# EAGLE board Headlightsv1 (EAGLE 7.6.0)
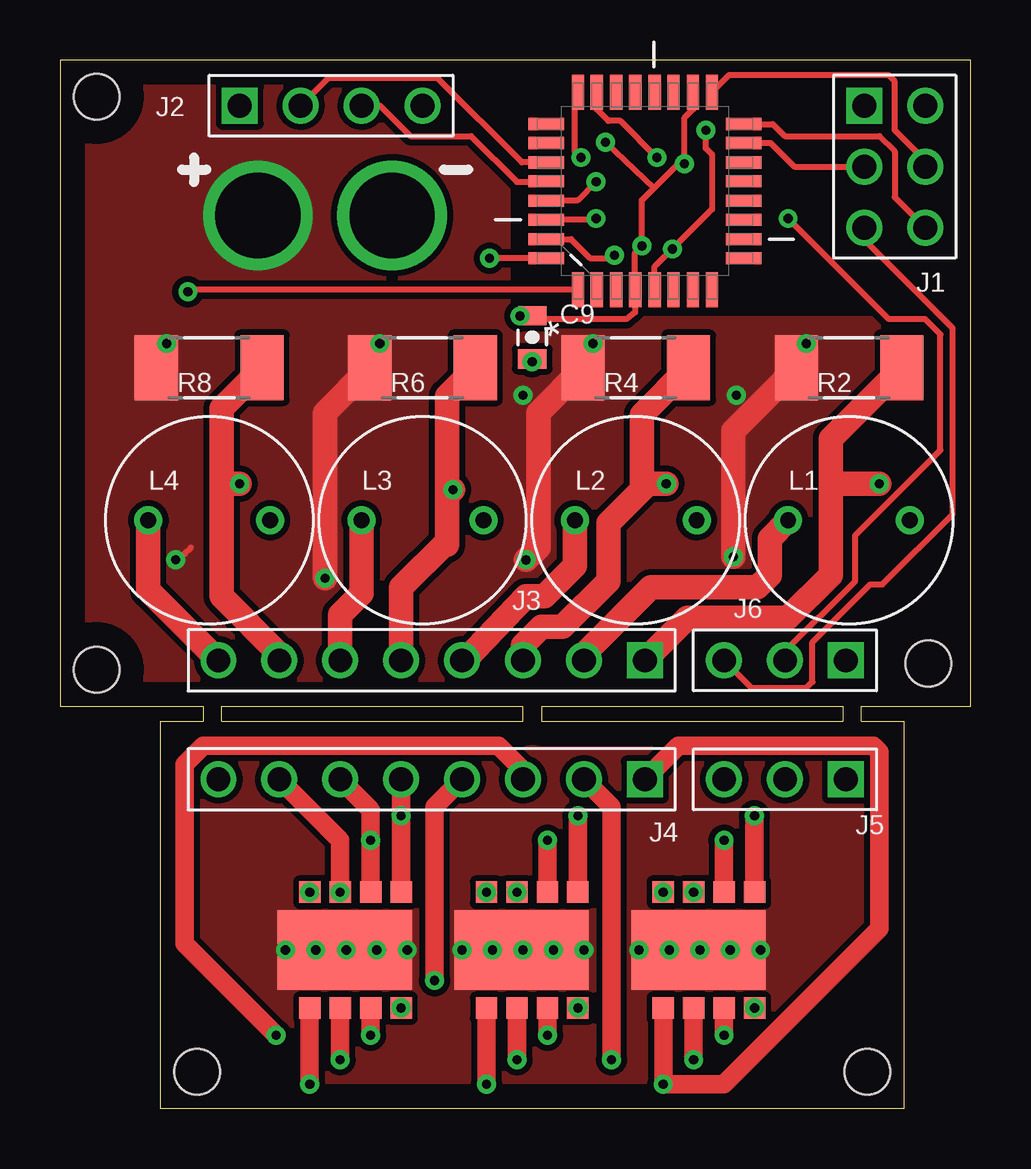
[diagram p0: board, top side]
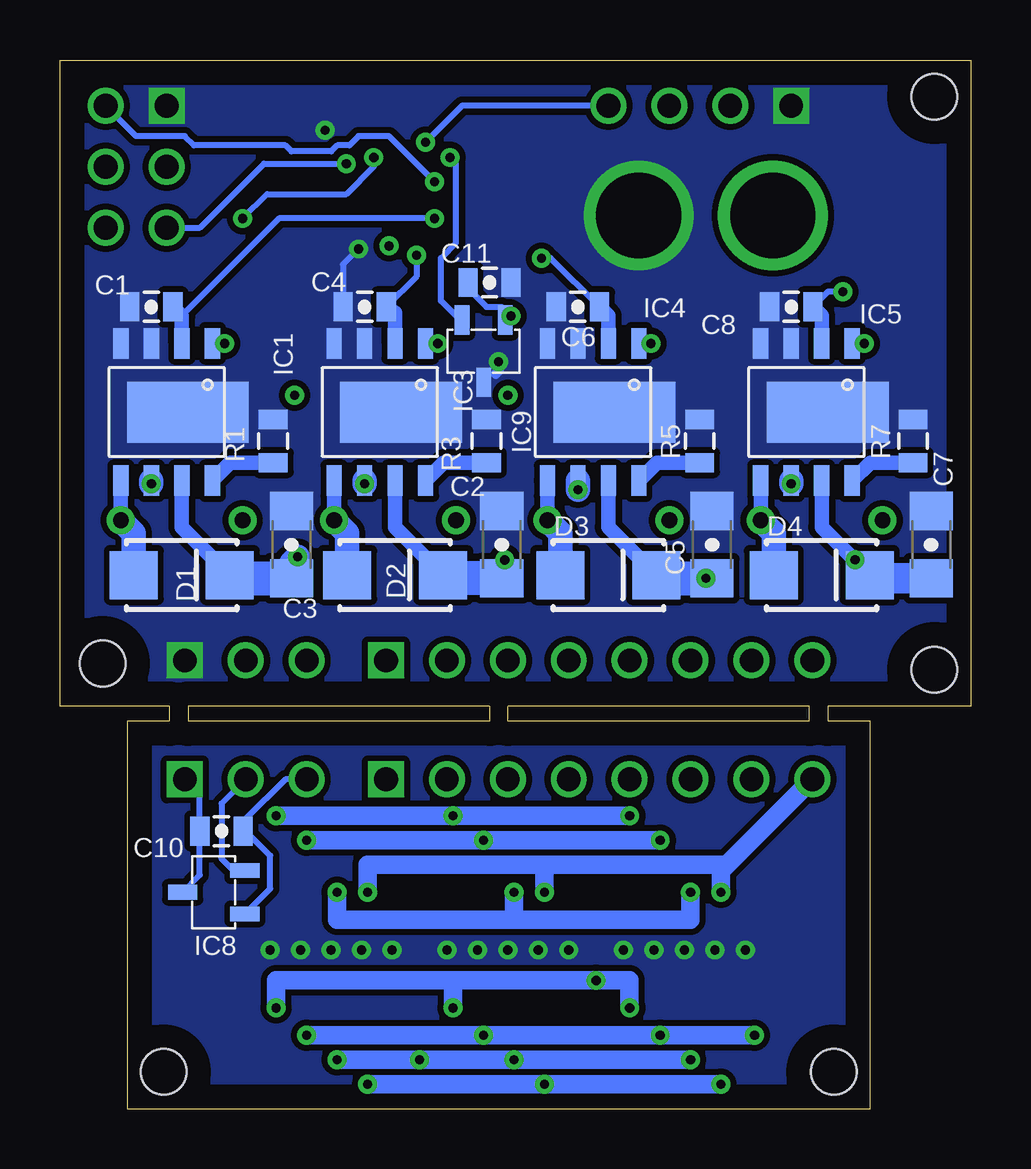
[diagram p1: board, bottom side, seen from below]

Size 37.97 x 43.69 mm. Coordinates in mm from the lower left corner, seen from the top.
Outline: 0,16.76 5.97,16.76 5.97,16.13 4.19,16.13 4.19,0 35.18,0 35.18,16.13 33.4,16.13 33.4,16.76 37.97,16.76 37.97,43.69 0,43.69 0,16.76
Outline: 6.73,16.76 19.3,16.76 19.3,16.13 6.73,16.13 6.73,16.76
Outline: 20.07,16.76 32.64,16.76 32.64,16.13 20.07,16.13 20.07,16.76
Copper layers (1*16): Top 0.035mm / dielectric 1.5mm / Bottom 0.035mm
Design rules "default": minimum track width 10mil, minimum drill 24mil, track to track 8mil, track to pad 8mil, pad to pad 8mil, via to via 8mil, smd to smd 8mil, copper to edge 40mil, drill to drill 8mil, minimum pad ring 10mil, minimum via ring 8mil, stop-mask expansion 4mil, vias tented up to drill 0mil, thermal gap 10mil
Holes 1.91 mm at 36.2,18.54 1.52,18.29 1.52,42.16 5.71,1.52 33.66,1.52

## Footprints (pad centres in the part's own frame; a part is rotated, then mirrored left to right if it is on the bottom)
0805-CAP = smd 0.8 x 1.2: 1 -0.9,0; 2 0.9,0
1206-CAP = smd 1.6 x 1.8: 1 -1.4,0; 2 1.4,0
SMA-DIODE_ALT = smd 2 x 2: A -2,0; C 2,0
PG-DSO-8-27 = smd 0.635 x 1.27: P$1 0,0; P$2 1.27,0; P$3 2.54,0; P$4 3.81,0; P$5 3.81,5.715; P$6 2.54,5.715; P$7 1.27,5.715; P$8 0,5.715 | smd 5.08 x 2.54: P$9 1.016,2.857
LED_RGBW_CUSTOM = smd 0.889 x 0.889: 1 0,0; 2 1.27,0; 3 2.54,0; 4 3.81,0; 5 3.81,4.826; 6 2.54,4.826; 7 1.27,4.826; 8 0,4.826 | smd 5.588 x 3.302: 9 1.46,2.413
SOT-23-3 = smd 1.219 x 0.61: 1 -1.36,0.78; 2 -1.36,-1.02; 3 1.24,-0.12
2X3PIN_.1' = drill 0.991: P$1 -1.27,1.27; P$2 1.27,1.27; P$3 -1.27,-1.27; P$4 1.27,-1.27; P$5 -1.27,-3.81 | drill 0.991 square: P$6 1.27,-3.81
4PIN_.1' = drill 0.991 square: P$1 -3.81,0 | drill 0.991: P$2 -1.27,0; P$3 1.27,0; P$4 3.81,0
8PIN_.1' = drill 0.991 square: P$1 -8.89,0 | drill 0.991: P$2 -6.35,0; P$3 -3.81,0; P$4 -1.27,0; P$5 1.27,0; P$6 3.81,0; P$7 6.35,0; P$8 8.89,0
3PIN_.1' = drill 0.991 square: P$1 -2.54,0 | drill 0.991: P$2 0,0; P$3 2.54,0
IND_RLB_SERIES = drill 0.66: P$1 -2.54,0; P$2 2.54,0
0805 = smd 0.8 x 1.2: 1 -0.9,0; 2 0.9,0
R2010 = smd 1.8 x 2.7: 1 -2.2,0; 2 2.2,0
QFP80P900X900X120-32N = smd 1.473 x 0.508: 1 -4.115,2.794; 2 -4.115,2.007; 3 -4.115,1.194; 4 -4.115,0.406; 5 -4.115,-0.406; 6 -4.115,-1.194; 7 -4.115,-2.007; 8 -4.115,-2.794; 17 4.115,-2.794; 18 4.115,-2.007; 19 4.115,-1.194; 20 4.115,-0.406; 21 4.115,0.406; 22 4.115,1.194; 23 4.115,2.007; 24 4.115,2.794 | smd 0.508 x 1.473: 9 -2.794,-4.115; 10 -2.007,-4.115; 11 -1.194,-4.115; 12 -0.406,-4.115; 13 0.406,-4.115; 14 1.194,-4.115; 15 2.007,-4.115; 16 2.794,-4.115; 25 2.794,4.115; 26 2.007,4.115; 27 1.194,4.115; 28 0.406,4.115; 29 -0.406,4.115; 30 -1.194,4.115; 31 -2.007,4.115; 32 -2.794,4.115

## Placement (x,y rotation side)
C1  10uF  [0805-CAP]  34.16,33.4 180 bottom
C2  1uF  [1206-CAP]  19.56,23.5 90 bottom
C3  1uF  [1206-CAP]  28.32,23.5 90 bottom
C4  10uF  [0805-CAP]  25.27,33.4 180 bottom
C5  1uF  [1206-CAP]  10.79,23.5 90 bottom
C6  10uF  [0805-CAP]  16.38,33.4 180 bottom
C7  1uF  [1206-CAP]  1.65,23.5 90 bottom
C8  10uF  [0805-CAP]  7.49,33.4 180 bottom
C9  0.33uF  [0805-CAP]  19.68,32.13 270 top
C10  0.33uF  [0805-CAP]  31.24,11.56 0 bottom
C11  0.33uF  [0805-CAP]  20.07,34.42 0 bottom
D1  [SMA-DIODE_ALT]  32.89,22.23 0 bottom
D2  [SMA-DIODE_ALT]  24,22.23 0 bottom
D3  [SMA-DIODE_ALT]  15.11,22.23 0 bottom
D4  [SMA-DIODE_ALT]  6.22,22.23 0 bottom
IC1  ILD6150_LED_DRIVER  [PG-DSO-8-27]  31.62,31.88 180 bottom
IC2  LED_RGBW_CONF2  [LED_RGBW_CUSTOM]  25.15,4.19 0 top
IC3  ILD6150_LED_DRIVER  [PG-DSO-8-27]  22.73,31.88 180 bottom
IC4  ILD6150_LED_DRIVER  [PG-DSO-8-27]  13.84,31.88 180 bottom
IC5  ILD6150_LED_DRIVER  [PG-DSO-8-27]  4.95,31.88 180 bottom
IC6  LED_RGBW_CONF2  [LED_RGBW_CUSTOM]  10.41,4.19 0 top
IC7  LED_RGBW_CONF2  [LED_RGBW_CUSTOM]  17.78,4.19 0 top
IC8  TEMP_MCP9701  [SOT-23-3]  31.62,8.89 180 bottom
IC9  TEMP_MCP9701  [SOT-23-3]  20.19,31.5 270 bottom
J1  ISPHEADER  [2X3PIN_.1']  34.8,37.97 180 top
J2  CONNECTOR_4PIN  [4PIN_.1']  11.3,41.78 0 top
J3  CONNECTOR_8PIN  [8PIN_.1']  15.49,18.67 180 top
J4  CONNECTOR_8PIN  [8PIN_.1']  15.49,13.72 180 top
J5  CONNECTOR_3PIN  [3PIN_.1']  30.23,13.72 180 top
J6  CONNECTOR_3PIN  [3PIN_.1']  30.23,18.67 180 top
L1  33uH  [IND_RLB_SERIES]  32.89,24.51 0 top
L2  33uH  [IND_RLB_SERIES]  24,24.51 0 top
L3  33uH  [IND_RLB_SERIES]  15.11,24.51 0 top
L4  33uH  [IND_RLB_SERIES]  6.22,24.51 0 top
R1  10k  [0805]  29.08,27.81 90 bottom
R2  .11  [R2010]  32.89,30.86 180 top
R3  10k  [0805]  20.19,27.81 90 bottom
R4  .11  [R2010]  24,30.86 180 top
R5  10k  [0805]  11.3,27.81 90 bottom
R6  .11  [R2010]  15.11,30.86 180 top
R7  10k  [0805]  2.41,27.81 90 bottom
R8  .11  [R2010]  6.22,30.86 180 top
U1  ATTINY48-AU  [QFP80P900X900X120-32N]  24.38,38.23 90 top

## Library data of the parts
C1 C4 C6 C8 = SparkFun-Capacitors; PROD_ID: CAP-11330
C2 C3 C5 C7 = SparkFun-Capacitors
C9-C11 = SparkFun-Capacitors; PROD_ID: CAP-08469
D1-D4 = SparkFun-DiscreteSemi
IC1-IC9 J1-J6 L1-L4 = lolomolo
R1 R3 R5 R7 = SparkFun-Resistors; PROD_ID: RES-11622
R2 R4 R6 R8 = SparkFun-Resistors; PROD_ID: RES-08354
U1 = Atmel_By_element14_Batch_1-00; MPN: ATTINY48-AU; OC_FARNELL: 1636953; OC_NEWARK: 68T3768; PACKAGE: QFP-32; SUPPLIER: Atmel

## Nets
5V: C9.1 C11.1 IC9.1 J1.P$2 J2.P$4 J6.P$3 U1.4 U1.18
5VO: C10.2 IC8.1 J5.P$3
BA: J3.P$6 L3.P$1
BAO: IC2.6 IC6.6 IC7.6 J4.P$6
BC: IC4.P$6 J3.P$5 R6.1
BCO: IC2.5 IC6.5 IC7.5 J4.P$5
DIMB: C6.1 IC4.P$2 U1.32
DIMG: C4.1 IC3.P$2 U1.31
DIMR: C1.1 IC1.P$2 U1.30
DIMW: C8.1 IC5.P$2 U1.1
GA: J3.P$4 L2.P$1
GAO: IC2.4 IC6.4 IC7.4 J4.P$4
GC: IC3.P$6 J3.P$3 R4.1
GCO: IC2.3 IC6.3 IC7.3 J4.P$3
GND: C1.2 C2.2 C3.2 C4.2 C5.2 C6.2 C7.2 C8.2 C9.2 C11.2 IC1.P$3 IC1.P$4 IC1.P$9 IC3.P$3 IC3.P$4 IC3.P$9 IC4.P$3 IC4.P$4 IC4.P$9 IC5.P$3 IC5.P$4 IC5.P$9 IC9.3 J1.P$6 J2.P$1 J6.P$1 R1.2 R3.2 R5.2 R7.2 U1.5
GNDO: C10.1 IC8.3 J5.P$1
HEAT: IC2.9 IC6.9 IC7.9
MISO: J1.P$1 U1.16
MOSI: J1.P$4 U1.15
N$1: IC1.P$8 R1.1
N$2: IC3.P$8 R3.1
N$3: D2.A IC3.P$5 L2.P$2
N$4: IC4.P$8 R5.1
N$5: D1.A IC1.P$5 L1.P$2
N$6: D3.A IC4.P$5 L3.P$2
N$7: IC5.P$8 R7.1
N$8: D4.A IC5.P$5 L4.P$2
RA: J3.P$2 L1.P$1
RAO: IC2.2 IC6.2 IC7.2 J4.P$2
RC: IC1.P$6 J3.P$1 R2.1
RCO: IC2.1 IC6.1 IC7.1 J4.P$1
RESET: J1.P$5 U1.29
SCK: J1.P$3 U1.17
SCL: J2.P$3 U1.28
SDA: J2.P$2 U1.27
TEMP1: J6.P$2 U1.23
TEMP1O: IC8.2 J5.P$2
TEMP2: IC9.2 U1.24
TEMP3: U1.25
TEMP4: U1.26
TEMP5: U1.19
TEMP6: U1.22
VBAT: C2.1 C3.1 C5.1 C7.1 D1.C D2.C D3.C D4.C IC1.P$1 IC1.P$7 IC3.P$1 IC3.P$7 IC4.P$1 IC4.P$7 IC5.P$1 IC5.P$7 R2.2 R4.2 R6.2 R8.2
WA: J3.P$8 L4.P$1
WAO: IC2.8 IC6.8 IC7.8 J4.P$8
WC: IC5.P$6 J3.P$7 R8.1
WCO: IC2.7 IC6.7 IC7.7 J4.P$7

## Tracks (layer width: path | path; a pad name or v marks a point on that pad's centre or on a via)
5V  (via drill 0.38)
  Top 0.254: J6.P$3 28.83,17.53 31.11,17.53 31.37,17.78 31.37,19.43 33.78,21.84 34.29,21.84 37.21,24.77 37.21,32.51 33.53,36.2 J1.P$2 | v22.73,40.26 24.77,38.35 | C9.1 v19.19,33.03 v19.18,33.02 19.3,32.89 23.62,32.89 23.98,33.17 U1.4 23.98,35.66 v24.26,35.94 24.26,37.85 24.77,38.35 | 24.77,38.35 25.78,39.37 v26.04,39.37 26.04,41.27 26.42,41.66 26.42,42.32 U1.18
  Bottom 0.254: J1.P$2 32.13,36.7 29.46,39.37 v26.04,39.37 | J2.P$4 21.21,41.78 v22.73,40.26 | IC9.1 19.25,33.02 v19.18,33.02 19.56,33.4 20.19,33.4 20.97,34.17 C11.1
5VO
  Bottom 0.254: J5.P$3 28.57,13.72 30.23,12.06 30.23,11.67 C10.2 30.23,11.56 29.21,10.54 29.21,9.16 IC8.1
BA
  Top 1.016: J3.P$6 11.68,20.57 12.57,21.46 L3.P$1
BAO  (via drill 0.38)
  Top 0.762: IC6.6 v12.95,11.18 12.95,12.45 J4.P$6 | v20.32,11.18 IC7.6 | IC2.6 v27.69,11.18
  Bottom 0.762: v12.95,11.18 v20.32,11.18 v27.69,11.18
BC  (via drill 0.38)
  Top 1.016: R6.1 16.13,29.68 16.13,25.78 | 16.13,25.78 16.13,23.62 | 16.13,23.62 16.13,23.5 | 16.13,25.78 v16.38,25.78 | J3.P$5 14.22,21.72 16.13,23.62
  Bottom 1.016: v16.38,25.78 IC4.P$6
BCO  (via drill 0.38)
  Top 0.762: IC2.5 v28.96,12.19 | v21.59,12.19 IC7.5 | IC6.5 v14.22,12.19 J4.P$5
  Bottom 0.762: v28.96,12.19 v21.59,12.19 v14.22,12.19
DIMB  (via drill 0.38)
  Top 0.254: U1.32 v17.91,35.43
  Bottom 0.254: v17.91,35.43 17.52,35.43 C6.1
  Bottom 0.61: IC4.P$2 15.11,33.03 C6.1
DIMG  (via drill 0.38)
  Top 0.254: U1.31 21.31,36.22 22.1,35.43 22.99,35.43 v23.11,35.56
  Bottom 0.254: v23.11,35.56 23.11,34.66 C4.1
  Bottom 0.61: IC3.P$2 24,33.16 C4.1
DIMR  (via drill 0.38)
  Top 0.254: v22.35,37.08 22.3,37.03 U1.30
  Bottom 0.254: 32.89,33.03 28.84,37.08 v22.35,37.08
  Bottom 0.61: IC1.P$2 32.89,33.03 C1.1
DIMW  (via drill 0.38)
  Top 0.254: U1.1 5.41,34.11 v5.33,34.04
  Bottom 0.254: v5.33,34.04 5.96,34.04 C8.1
  Bottom 0.61: IC5.P$2 6.22,33.03 C8.1
GA
  Top 1.016: J3.P$4 16.89,18.67 19.43,21.34 20.19,21.34 21.46,22.61 L2.P$1
GAO  (via drill 0.38)
  Top 0.762: v15.62,5.33 15.62,12.57 J4.P$4
  Bottom 0.762: IC6.4 14.22,5.33 v15.62,5.33 21.59,5.33 | 21.59,5.33 28.96,5.33 IC2.4 | IC7.4 21.59,5.33
  other vias: 14.22,4.19 28.96,4.19 21.59,4.19
GC  (via drill 0.38)
  Top 1.016: R4.1 24.26,28.91 24.26,26.04 24.51,26.04 | v25.27,26.04 24.51,26.04 | J3.P$3 19.3,19.3 20.07,20.07 20.95,20.07 22.86,21.97 22.86,24.38 24.51,26.04
  Bottom 1.016: IC3.P$6 v25.27,26.04
GCO  (via drill 0.38)
  Top 0.762: IC6.3 v12.95,3.05 | v27.69,3.05 IC2.3 | IC7.3 v20.32,3.05 | J4.P$3 19.3,14.1 18.29,15.11 5.97,15.11 5.21,14.35 5.21,6.86 v9.02,3.05
  Bottom 0.762: v27.69,3.05 v20.32,3.05 v12.95,3.05 v9.02,3.05
GND  (via drill 0.38, 3.56)
  Top 0.254: U1.5 24.79,35.08 v25.53,35.81 27.18,37.47 27.18,39.75 26.92,40.01 v26.92,40.77
  Top 0.406: C9.2 v19.68,31.11
  Bottom 0.254: v25.53,35.81 26.17,35.17 C4.2 | J1.P$6 33.53,42.16
  Bottom 0.406: v19.68,31.11 19.68,30.73 19.81,30.61
  other vias: 13.84,37.21
  pour Bottom (isolate 0.254, no thermals): 0,16.76 37.97,16.76 37.97,43.69 0,43.69
GNDO
  Bottom 0.254: J5.P$1 32.14,13.09 C10.1 32.14,9.73 IC8.3
HEAT  (via drill 0.38)
  other vias: 9.4,6.6 10.67,6.6 11.94,6.6 13.21,6.6 14.48,6.6 16.76,6.6 18.03,6.6 19.3,6.6 20.57,6.6 21.84,6.6 24.13,6.6 25.4,6.6 26.67,6.6 27.94,6.6 29.21,6.6
  pour Top (isolate 0.254, no thermals): 4.32,16 35.05,16 35.05,0.13 4.32,0.13
  pour Bottom (isolate 0.254, no thermals): 4.32,16 35.05,16 35.05,0.13 4.32,0.13
MISO
  Top 0.254: U1.16 29.72,41.02 30.23,40.51 34.16,40.51 34.8,39.88 34.8,37.97 J1.P$1
MOSI
  Top 0.254: U1.15 29.62,40.23 30.61,39.24 J1.P$4
N$1
  Bottom 0.61: R1.1 30.87,26.91 IC1.P$8
N$2
  Bottom 0.61: R3.1 21.98,26.91 IC3.P$8
N$3
  Bottom 0.61: IC3.P$5 L2.P$2
  Bottom 1.016: L2.P$2 26,23.97 D2.A
N$4
  Bottom 0.61: R5.1 13.09,26.91 IC4.P$8
N$5
  Bottom 0.61: IC1.P$5 L1.P$2
  Bottom 1.016: L1.P$2 34.89,23.97 D1.A
N$6
  Bottom 0.61: IC4.P$5 L3.P$2
  Bottom 1.016: L3.P$2 17.11,23.97 D3.A
N$7
  Bottom 0.61: R7.1 4.2,26.91 IC5.P$8
N$8
  Bottom 0.61: IC5.P$5 L4.P$2
  Bottom 1.016: L4.P$2 8.22,23.97 D4.A
RA
  Top 1.016: L1.P$1 29.59,23.75 29.59,22.23 29.08,21.72 24.64,21.72 21.84,18.92 J3.P$2
RAO  (via drill 0.38)
  Top 0.762: IC6.2 v11.68,2.03 | v26.42,2.03 IC2.2 | IC7.2 v19.05,2.03 | J4.P$2 22.99,12.57 v22.99,2.03
  Bottom 0.762: v11.68,2.03 v19.05,2.03 v22.99,2.03 v26.42,2.03
RC  (via drill 0.38)
  Top 1.016: R2.1 32.13,27.9 32.13,26.04 | 32.13,26.04 32.13,22.23 30.35,20.45 26.16,20.45 J3.P$1 | v34.16,26.04 32.13,26.04
  Bottom 1.016: IC1.P$6 v34.16,26.04
RCO  (via drill 0.38)
  Top 0.762: IC6.1 v10.41,1.02 | v17.78,1.02 IC7.1 | IC2.1 v25.15,1.02 27.69,1.02 34.16,7.49 34.16,14.86 33.91,15.11 25.78,15.11 J4.P$1
  Bottom 0.762: v10.41,1.02 v17.78,1.02 v25.15,1.02
RESET  (via drill 0.38)
  Top 0.254: U1.29 20.3,37.85 21.59,37.85 v22.35,38.61
  Bottom 0.254: J1.P$5 34.8,40.51 32.77,40.51 32.38,40.13 28.57,40.13 28.32,39.88 26.67,39.88 26.42,40.13 25.91,40.13 25.53,40.51 24.26,40.51 v22.35,38.61
SCK
  Top 0.254: J1.P$3 36.07,39.5 34.8,40.77 34.8,42.8 34.54,43.05 27.89,43.05 U1.17
SCL
  Top 0.254: J2.P$3 13.34,41.78 14.61,40.51 17.14,40.51 19.05,38.61 20.24,38.61 U1.28
SDA
  Top 0.254: U1.27 19.25,39.42 15.75,42.93 11.18,42.93 J2.P$2
TEMP1  (via drill 0.38)
  Top 0.254: J6.P$2 30.23,19.05 33.15,21.97 33.15,23.88 36.7,27.43 36.7,32.26 36.07,32.89 34.54,32.89 v30.35,37.08 | v24.89,39.62 23.37,41.15 22.86,41.15 22.38,41.63 U1.23
  Bottom 0.254: v30.35,37.08 29.34,38.1 26.04,38.1 24.89,39.24 v24.89,39.62
TEMP1O
  Bottom 0.254: J5.P$2 31.24,12.7 31.24,10.41 30.73,9.91 IC8.2
TEMP2  (via drill 0.38)
  Top 0.254: v21.72,39.62 21.46,39.88 21.46,42.22 U1.24
  Bottom 0.254: IC9.2 21.3,32.86 22.1,33.66 22.1,35.43 21.46,36.07 21.46,39.37 v21.72,39.62
VBAT  (via drill 0.38, 3.56)
  Top 0.254: v4.83,22.86 5.21,23.11 5.46,23.37
  Top 0.61: v4.45,31.88 3.94,30.95 R8.2 | v13.34,31.88 13.34,31.28 | v22.23,31.88 22.23,31.28 | v31.11,31.88 31.11,31.28 R2.2
  Top 0.813: R4.2 22.23,31.28 | R6.2 13.34,31.28
  Top 1.016: R6.2 11.05,29 v11.05,22.09 | R4.2 19.94,29 19.94,23.37 v19.43,22.86 | R2.2 28.07,28.23 v28.07,22.99
  Bottom 0.254: D4.C 4.22,22.26 v4.83,22.86
  Bottom 0.61: IC3.P$7 24,24.23 D2.C | IC1.P$7 32.89,24.23 D1.C | IC4.P$7 15.11,24.23 D3.C | IC5.P$7 6.22,24.23 D4.C | IC5.P$1 v4.45,31.88 | IC4.P$1 v13.34,31.88 | IC3.P$1 v22.23,31.88 | IC1.P$1 v31.11,31.88
  Bottom 0.762: C2.1 19.43,22.22 v19.43,22.86
  Bottom 1.016: v28.07,22.99 28.32,22.73 C3.1
  Bottom 1.27: C7.1 4.09,22.09 D4.C
  Bottom 1.422: D1.C 30.76,22.09 C3.1 | 21.87,22.09 D2.C 21.46,22.23 21.34,22.1 C2.1 | D3.C 12.98,22.09 v11.05,22.09 C5.1
  other vias: 8.26,37.21 28.19,29.72 19.3,29.72
  pour Top (isolate 0.254, no thermals): 0,16.76 37.97,16.76 37.97,32.89 18.67,32.89 18.67,43.69 0,43.69
WA
  Top 1.016: L4.P$1 3.68,21.59 J3.P$8
WAO  (via drill 0.38)
  Bottom 0.762: 17.78,10.16 10.41,10.16 IC6.8 10.41,9.91 J4.P$8 | 17.78,10.16 25.15,10.16 IC2.8 | IC7.8 17.78,10.16
  other vias: 10.41,9.02 25.15,9.02 17.78,9.02
WC  (via drill 0.38)
  Top 1.016: R8.1 6.73,29.17 6.73,26.04 | v7.49,26.04 6.73,26.04 | J3.P$7 9.14,18.92 6.73,21.34 6.73,26.04
  Bottom 1.016: IC5.P$6 v7.49,26.04
WCO  (via drill 0.38)
  Top 0.762: IC6.7 11.68,11.18 J4.P$7
  Bottom 0.762: IC6.7 11.68,7.87 19.05,7.87 | IC2.7 26.42,7.87 19.05,7.87 | IC7.7 19.05,7.87
  other vias: 11.68,9.02 26.42,9.02 19.05,9.02